# Altium PCB PCB1.PcbDoc
Units mil, origin at the board's own origin, x right, y up, seen from the top; angles counter-clockwise.
Board outline 3325 x 1950 mil, 2 copper layers (Top Layer, Bottom Layer); 24 components, 27 nets, 86 pads, 0 vias.
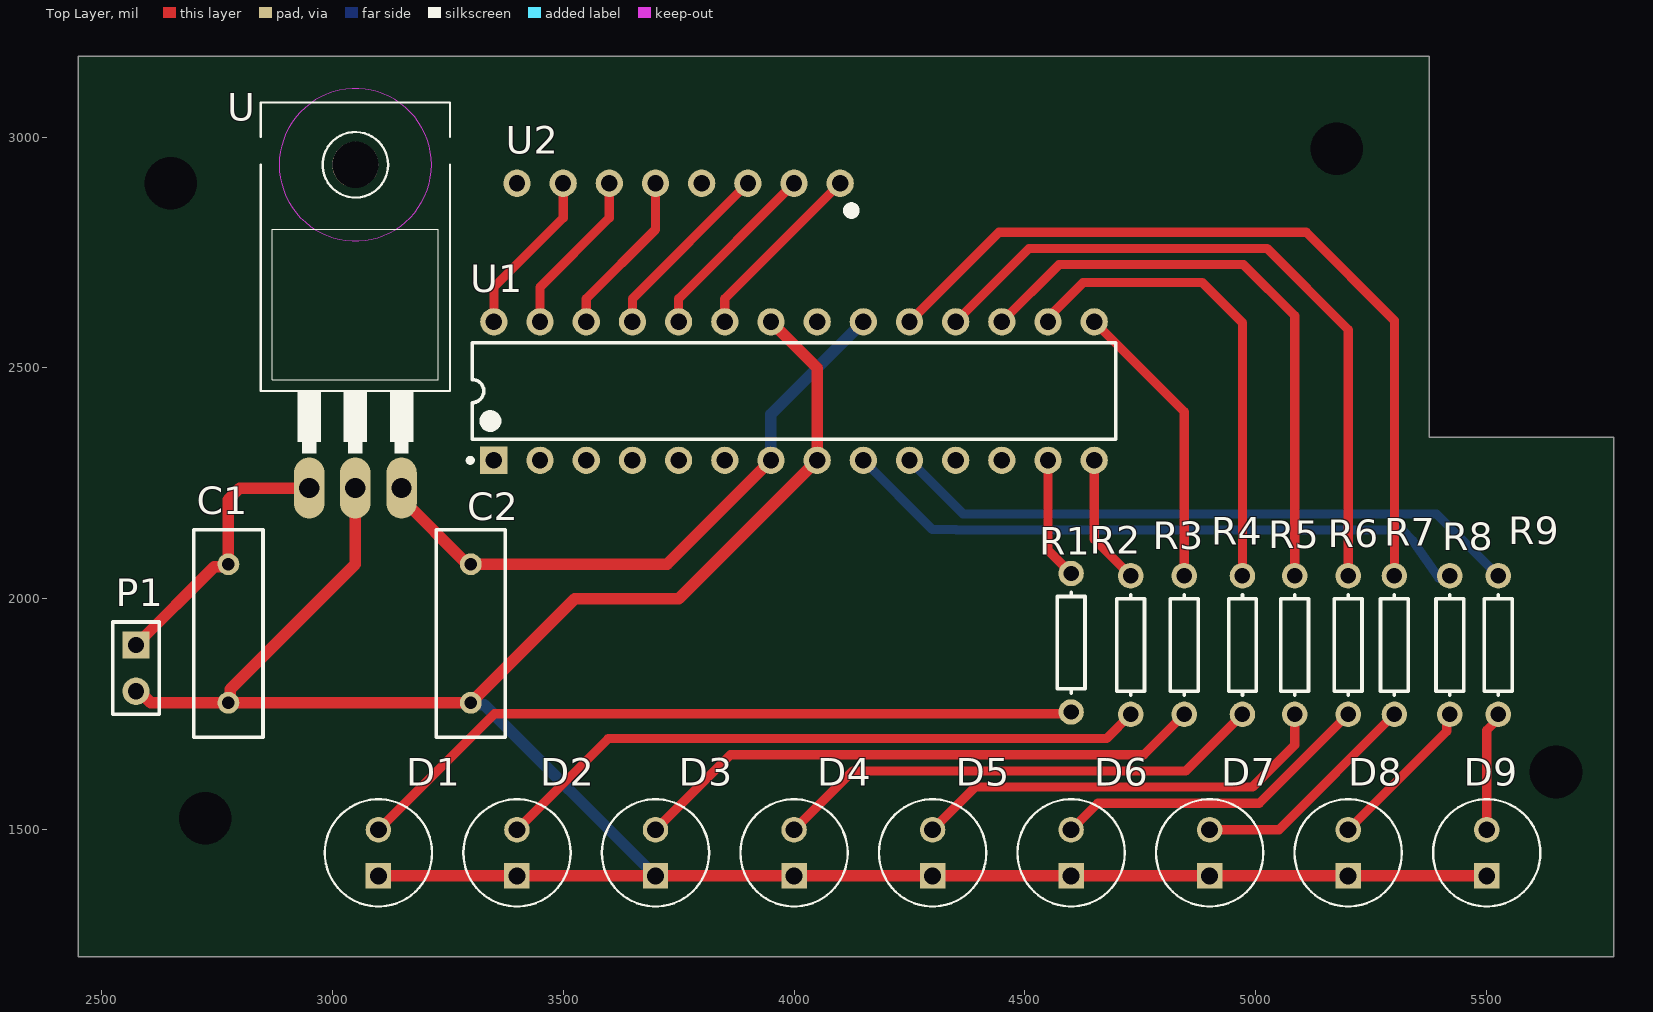
[diagram p0: Top Layer view]
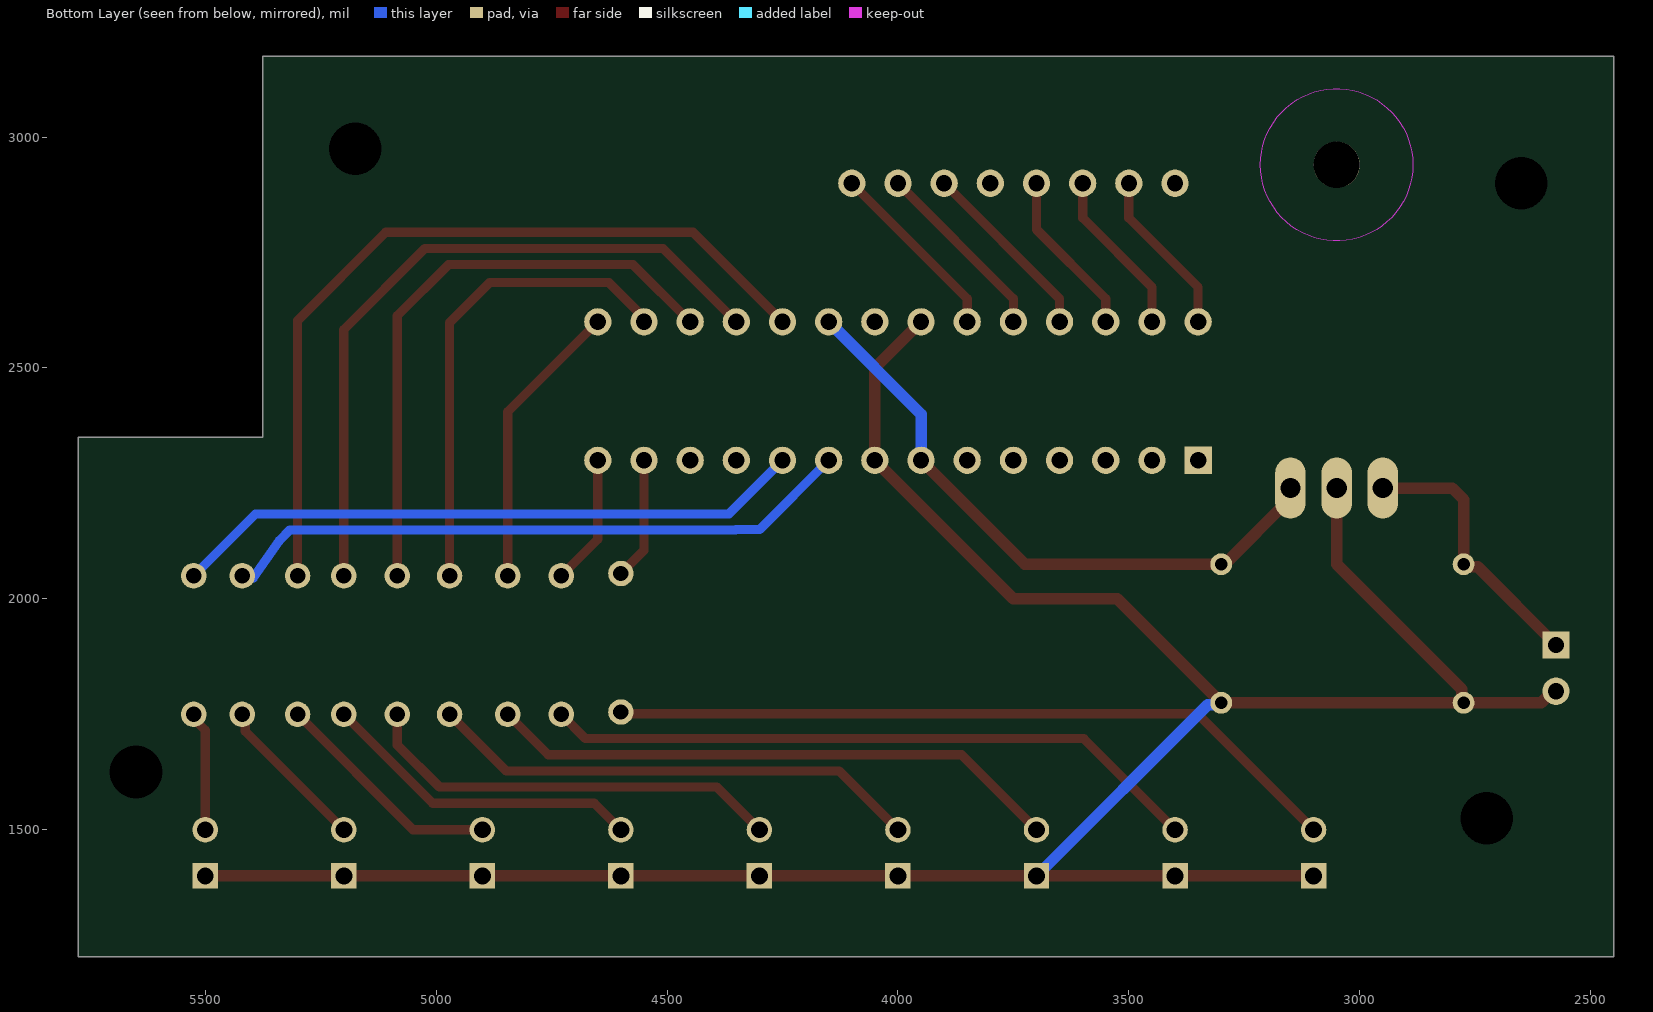
[diagram p1: Bottom Layer view, seen from below]

## Layer stack, top to bottom
Top Solder: solder mask 0.4, Solder Resist, Dk 3.5
Top Layer: signal copper 1.4
Dielectric 1: dielectric 12.6, FR-4, Dk 4.8
Bottom Layer: signal copper 1.4
Bottom Solder: solder mask 0.4, Solder Resist, Dk 3.5

## Board outline
5375,3175 5375,2350 5775,2350 5775,1225 2450,1225 2450,3175

## Design rules (kind name [scope] priority, off if disabled: settings)
AssemblyTestPointUsage [All] p1 off:
AssemblyTestpoint [All] p1 off: testpointundercomponent=TRUE minsize=40 maxsize=100 preferedsize=60 minholesize=0 maxholesize=40 preferedholesize=32 testpointgrid=1 usegrid=TRUE gridtolerance=0.01 allowsidetop=TRUE allowsidebottom=TRUE
Clearance [All] p1: gap=15 ignorepadtopadclearanceinfootprint=TRUE
FabricationTestPointUsage [All] p1 off: valid=0 allowmultiple=FALSE
FabricationTestpoint [All] p1 off: side=3 testpointundercomponent=TRUE minsize=40 maxsize=100 preferedsize=60 minholesize=0 maxholesize=40 preferedholesize=32 testpointgrid=1 allowsidetop=TRUE allowsidebottom=TRUE usegrid=TRUE gridtolerance=0.01
PolygonConnect [All] p1: connectstyle=Relief reliefconductorwidth=10 reliefentries=4 polygonreliefangle="90 Angle" airgapwidth=10
RoutingVias [All] p1: holewidth=28 width=50 viastyle="Through Hole" minholewidth=28 minwidth=50 maxholewidth=28 maxwidth=50
SilkToSolderMaskClearance [IsPad] p1: minsilkscreentomaskgap=5 clearancetoexposedcopper=TRUE
SolderMaskExpansion [All] p1: expansion=4 istentingtop=FALSE
Width Width_1 [InNet('VCC') or InNet('GND') or InNet('NetC1_2')] p1: maxlimit=25 minlimit=15 preferedwidth=20 checkconnectedcopper=TRUE
Width [All] p2: maxlimit=20 minlimit=10 preferedwidth=15 minimp=50.000000 maximp=50.000000 favimp=50.000000
25 further rules are at their usual default settings.

## Components (designator, comment, footprint, x,y, rotation, side; value= is the part's Value field where it differs from the comment)
C1 "Cap" RAD-0.3 2775,1925 r90 top value=330nF
C2 "Cap" RAD-0.3 3300,1925 r90 top value=100nF
D1 "L-53GD" LEDRD254W50D500H1060 3100,1450 r90 top
D2 "L-53GD" LEDRD254W50D500H1060 3400,1450 r90 top
D3 "L-53GD" LEDRD254W50D500H1060 3700,1450 r90 top
D4 "L-53GD" LEDRD254W50D500H1060 4000,1450 r90 top
D5 "L-53GD" LEDRD254W50D500H1060 4300,1450 r90 top
D6 "L-53GD" LEDRD254W50D500H1060 4600,1450 r90 top
D7 "L-53GD" LEDRD254W50D500H1060 4900,1450 r90 top
D8 "L-53GD" LEDRD254W50D500H1060 5200,1450 r90 top
D9 "L-53GD" LEDRD254W50D500H1060 5500,1450 r90 top
P1 "Header 2" HDR1X2 2575,1900 r270 top
R1 "Res1" AXIAL-0.3 4600,1905 r270 top value=220R
R2 "Res1" AXIAL-0.3 4729,1900 r270 top value=220R
R3 "Res1" AXIAL-0.3 4845,1900 r270 top value=220R
R4 "Res1" AXIAL-0.3 4971,1900 r270 top value=220R
R5 "Res1" AXIAL-0.3 5084,1900 r270 top value=220R
R6 "Res1" AXIAL-0.3 5200,1900 r270 top value=220R
R7 "Res1" AXIAL-0.3 5300,1900 r270 top value=220R
R8 "Res1" AXIAL-0.3 5420,1900 r270 top value=220R
R9 "Res1" AXIAL-0.3 5525,1900 r270 top value=220R
U "LM7805" TO220 3050,2500 r0 top
U1 "ATmega328P-PU" 28P3 4000,2450 r90 top
U2 "keypad 4*3" "keypad 4*4" 3750,2900 r180 top

## Footprints (in the part's own frame and the unit in brackets; to place one, negate y for a bottom-side part, rotate by r counter-clockwise, add the part's x,y. Pads: shape width x height; smd on the part's side, far side on the other; paste and mask are expansions set on the pad)
28P3 [mm] "28-Pin Plastic Dual In-Line Package (PDIP)"
  rect 1.5x1.5 hole 0.9: 1(-3.81,16.51)
  round 1.5 hole 0.9: 2(-3.81,13.97) 3(-3.81,11.43) 4(-3.81,8.89) 5(-3.81,6.35) 6(-3.81,3.81) 7(-3.81,1.27) 8(-3.81,-1.27) 9(-3.81,-3.81) 10(-3.81,-6.35) 11(-3.81,-8.89) 12(-3.81,-11.43) 13(-3.81,-13.97) 14(-3.81,-16.51) 15(3.81,-16.51) 16(3.81,-13.97) 17(3.81,-11.43) 18(3.81,-8.89) 19(3.81,-6.35) 20(3.81,-3.81) 21(3.81,-1.27) 22(3.81,1.27) 23(3.81,3.81) 24(3.81,6.35) 25(3.81,8.89) 26(3.81,11.43) 27(3.81,13.97) 28(3.81,16.51)
  silkscreen extent -3.93,-17.7 2.65,17.93, body extent -3.6,-17.65 3.6,17.65, height 4.58
AXIAL-0.3 [mm] "Axial Device, Thru-Hole; 2 Leads; 0.3 in Pin Spacing"
  round 1.4 hole 0.85: 1(-3.81,0) 2(3.81,0)
  silkscreen extent -2.77,-0.76 2.77,0.76
HDR1X2 [mm] "Connector; Header; 2 Position"
  rect 1.5x1.5 hole 0.9: 1(0,0)
  round 1.5 hole 0.9: 2(2.54,0)
  silkscreen extent -1.27,-1.27 3.81,1.27
"keypad 4*4" [mm]
  round 1.5 hole 0.889: C1(1.27,0) C2(3.81,0) C3(6.35,0) C4(8.89,0) R1(-8.89,0) R2(-6.35,0) R3(-3.81,0) R4(-1.27,0)
  silkscreen extent -9.7,1.3 -9.3,1.7
LEDRD254W50D500H1060 [mm]
  round 1.4 hole 0.93: A(1.27,0)
  rect 1.4x1.4 hole 0.93: C(-1.27,0)
  silkscreen extent -2.95,-2.95 2.95,2.95
RAD-0.3 [mm] "Radial Cap, Thru-Hole; 2 Leads; 0.3 in Pin Spacing"
  round 1.2 hole 0.7: 1(-3.81,0) 2(3.81,0)
  silkscreen extent -5.71,-1.91 5.71,1.91
TO220 [mil]
  oval 66x132 hole 44: 1(-100,-260) 2(0,-260) 3(100,-260)
  round 100 hole 100 unplated: ""(0,440)
  Keep-Out Layer circle w0: c0,440 r165
  Keep-Out Layer circle w0: c0,440 r165
  silkscreen extent -205,-185 205,575

## Part data
C1 C2: "Capacitor", LatestRevisionDate=17-Jul-2002, LatestRevisionNote="Re-released for DXP Platform.", PackageDescription="Radial Cap, Thru-Hole; 2 Leads; 0.3 in Pin Spacing", PackageReference=RAD-0.3, Published=8-Jun-2000, Publisher="Altium Limited"
D1 D2 D3 D4 D5 D6 D7 D8 D9: "LED; 5mm; green; 5-32mcd; 60Â°; Front: convex", Package="CDIP-28 Kingbright", Availability=Unavailable, MF=Kingbright, MP=L-53GD, Price=None, SnapEDA_Link=https://www.snapeda.com/parts/L-53GD/Kingbright/view-part/525636/?ref=snap
P1: "Header, 2-Pin", LatestRevisionDate=17-Jul-2002, LatestRevisionNote="Re-released for DXP Platform.", Publisher="Altium Limited"
R1 R2 R3 R4 R5 R6 R7 R8 R9: "Resistor", LatestRevisionDate=17-Jul-2002, LatestRevisionNote="Re-released for DXP Platform.", PackageDescription="Axial Device, Thru-Hole; 2 Leads; 0.3 in Pin Spacing", PackageReference=AXIAL-0.3, Published=8-Jun-2000, Publisher="Altium Limited"
U: "Linear Voltage Regulator IC 1 Output 1.5A SOT-223-4", Package="TO-220 Texas Instruments", Availability=Unavailable, MF="Texas Instruments", MP=LM7805, Price=None, SnapEDA_Link=https://www.snapeda.com/parts/LM7805/Texas%20Instruments/view-part/2302466/?ref=snap
U1: library part CMP-0095-00013-2, "8-bit AVR Microcontroller, 32KB Flash, 1KB EEPROM, 2KB SRAM, 28-pin PDIP, Industrial Grade (-40°C to 85°C)", ComponentLink1Description="Manufacturer URL", ComponentLink1URL=http://www.atmel.com/, ComponentLink2Description="ATmega48A/48PA/88A/88PA/168A/168PA/328/328P Datasheet", ComponentLink2URL=http://www.atmel.com/dyn/resources/prod_documents/8271.pdf, ComponentLink3Description="ATmega48A/48PA/88A/88PA/168A/168PA/328/328P Summary", ComponentLink3URL=http://www.atmel.com/dyn/resources/prod_documents/8271S.pdf, DatasheetVersion="revD, May-2011", PackageDescription="28-lead (0.300\"/7.62mm Wide) Plastic Dual Inline Package (PDIP)", PackageReference=28P3, PackageVersion="revB, Sep-2001", RevisionNote="DatasheetVersion updated. URLs added."

## Free pads (board coordinates)
  round 41.34 hole 114.17 unplated: 2(5175,2975) 3(2650,2900) 4(2725,1525) 5(5650,1625)

## Nets (pads, with @x,y where several pads share a name; then routed paths per layer and width w, separated by ;. In a path a pad name is that pad's centre, name@x,y a point inside that pad or via, vN(x,y) a via of type N, cw(c..) or ccw(c..) an arc to the next point about the centre after c; other vN are vias at no path point)
C1: U1.26 U2.C1 | length 362.1
  Top Layer w20: U1.26 3550,2650 3700,2800 U2.C1
C2: U1.27 U2.C2 | length 362.1
  Top Layer w20: U1.27 3450,2675 3600,2825 U2.C2
C3: U1.28 U2.C3 | length 362.1
  Top Layer w20: U1.28 3350,2675 3500,2825 U2.C3
GND: C1.1 C2.1 D1.C D2.C D3.C D4.C D5.C D6.C D7.C D8.C D9.C P1.2 U1.8 U1.22 U.2 | length 5585.6
  Top Layer w25: P1.2 2581.67,1800 2606.67,1775 C1.1 ; U.2 3050,2075 2779.26,1804.26 2779.26,1779.26 C1.1 ; D1.C D2.C D3.C D4.C D5.C D6.C D7.C D8.C D9.C ; U1.22 4050,2500 U1.8 3750,2000 3525,2000 C2.1 C1.1
  Bottom Layer w25: C2.1 3304.26,1770.74 3329.26,1770.74 D3.C ; U1.8 U1.8@4055.06,2294.94
NetC1_2: C1.2 P1.1 U.1 | length 597.8
  Top Layer w20: C1.2@2769.79,2069.79 C1.2
  Top Layer w25: P1.1 2744.79,2069.79 C1.2@2769.79,2069.79 ; C1.2 2775,2215 2800,2240 U.1
NetD1_A: D1.A R1.2 | length 1605.6
  Top Layer w20: D1.A 3351.38,1751.38 4596.38,1751.38 R1.2
NetD2_A: D2.A R2.2 | length 1432.6
  Top Layer w20: D2.A 3597.44,1697.44 4676.44,1697.44 R2.2
NetD3_A: D3.A R3.2 | length 1248.6
  Top Layer w20: D3.A 3862.44,1662.44 4757.44,1662.44 R3.2
NetD4_A: D4.A R4.2 | length 1074.6
  Top Layer w20: D4.A 4127.44,1627.44 4848.44,1627.44 R4.2
NetD5_A: D5.A R5.2 | length 926.5
  Top Layer w20: D5.A 4392.44,1592.44 4992.94,1592.44 5084,1683.5 R5.2
NetD6_A: D6.A R6.2 | length 703.6
  Top Layer w20: D6.A 4657.44,1557.44 5007.44,1557.44 R6.2
NetD7_A: D7.A R7.2 | length 503.6
  Top Layer w20: D7.A 5050,1500 R7.2
NetD8_A: D8.A R8.2 | length 341.1
  Top Layer w20: D8.A 5413.28,1713.28 5413.28,1743.28 R8.2
NetD9_A: D9.A R9.2 | length 260.4
  Top Layer w20: D9.A 5500,1715.5 5525,1740.5 R9.2
PB0: R2.1 U1.14 | length 282.7
  Top Layer w20: U1.14 4650,2129 R2.1
PB1: R3.1 U1.15 | length 630.8
  Top Layer w20: U1.15 4845,2405 R3.1
PB2: R4.1 U1.16 | length 1045.5
  Top Layer w20: U1.16 4550,2609 4626,2685 4884,2685 4971,2598 R4.1
PB3: R5.1 U1.17 | length 1294.3
  Top Layer w20: U1.17 4574,2724 4973,2724 5084,2613 R5.1
PB4: R6.1 U1.18 | length 1521.8
  Top Layer w20: U1.18 4509,2759 5024,2759 5200,2583 R6.1
PB5: R7.1 U1.19 | length 1762.5
  Top Layer w20: U1.19 4444,2794 5109,2794 5300,2603 R7.1
PB6: R8.1 U1.9 | length 1385.7
  Bottom Layer w20: U1.9 4300,2150 4350.5,2150 4351.5,2149 5317,2149 5340,2126 5395.75,2045.85 5399.9,2050 R8.1
PB7: R9.1 U1.10 | length 1378.6
  Bottom Layer w20: U1.10 4366,2184 5391,2184 R9.1
PD7: R1.1 U1.13 | length 265.7
  Top Layer w20: U1.13 4550,2105 R1.1
R1: U1.23 U2.R1 | length 403.6
  Top Layer w20: U1.23 3850,2650 U2.R1
R2: U1.24 U2.R2 | length 403.6
  Top Layer w20: U1.24 3750,2650 U2.R2
R3: U1.25 U2.R3 | length 403.6
  Top Layer w20: U1.25 3650,2650 U2.R3
VCC: C2.2 U1.7 U1.20 U.3 | length 1350.1
  Top Layer w20: U.3@3150,2217.63 U.3
  Top Layer w25: U.3@3150,2217.63 C2.2@3292.63,2075 ; C2.2 3725,2075 U1.7
  Bottom Layer w25: U1.7 3950,2400 U1.20
pads on no net: U1.1 U1.2 U1.3 U1.4 U1.5 U1.6 U1.11 U1.12 U1.21 U2.C4 U2.R4 U.

## Text inside footprints (layer, text, board x,y; h text height)
U: Mechanical 13 "3" at 3125.02,2500 h50.01; Mechanical 13 "2" at 3024.96,2500 h50.08; Mechanical 13 "1" at 2924.76,2500 h50.1